# Altium PCB PCB_Supply_Valvulado.PcbDoc
Units mm, origin at the board's own origin, x right, y up, seen from the top; angles counter-clockwise.
Board outline 49 x 60 mm, 2 copper layers (Top Layer, Bottom Layer); 6 components, 36 nets, 21 pads, 0 vias.
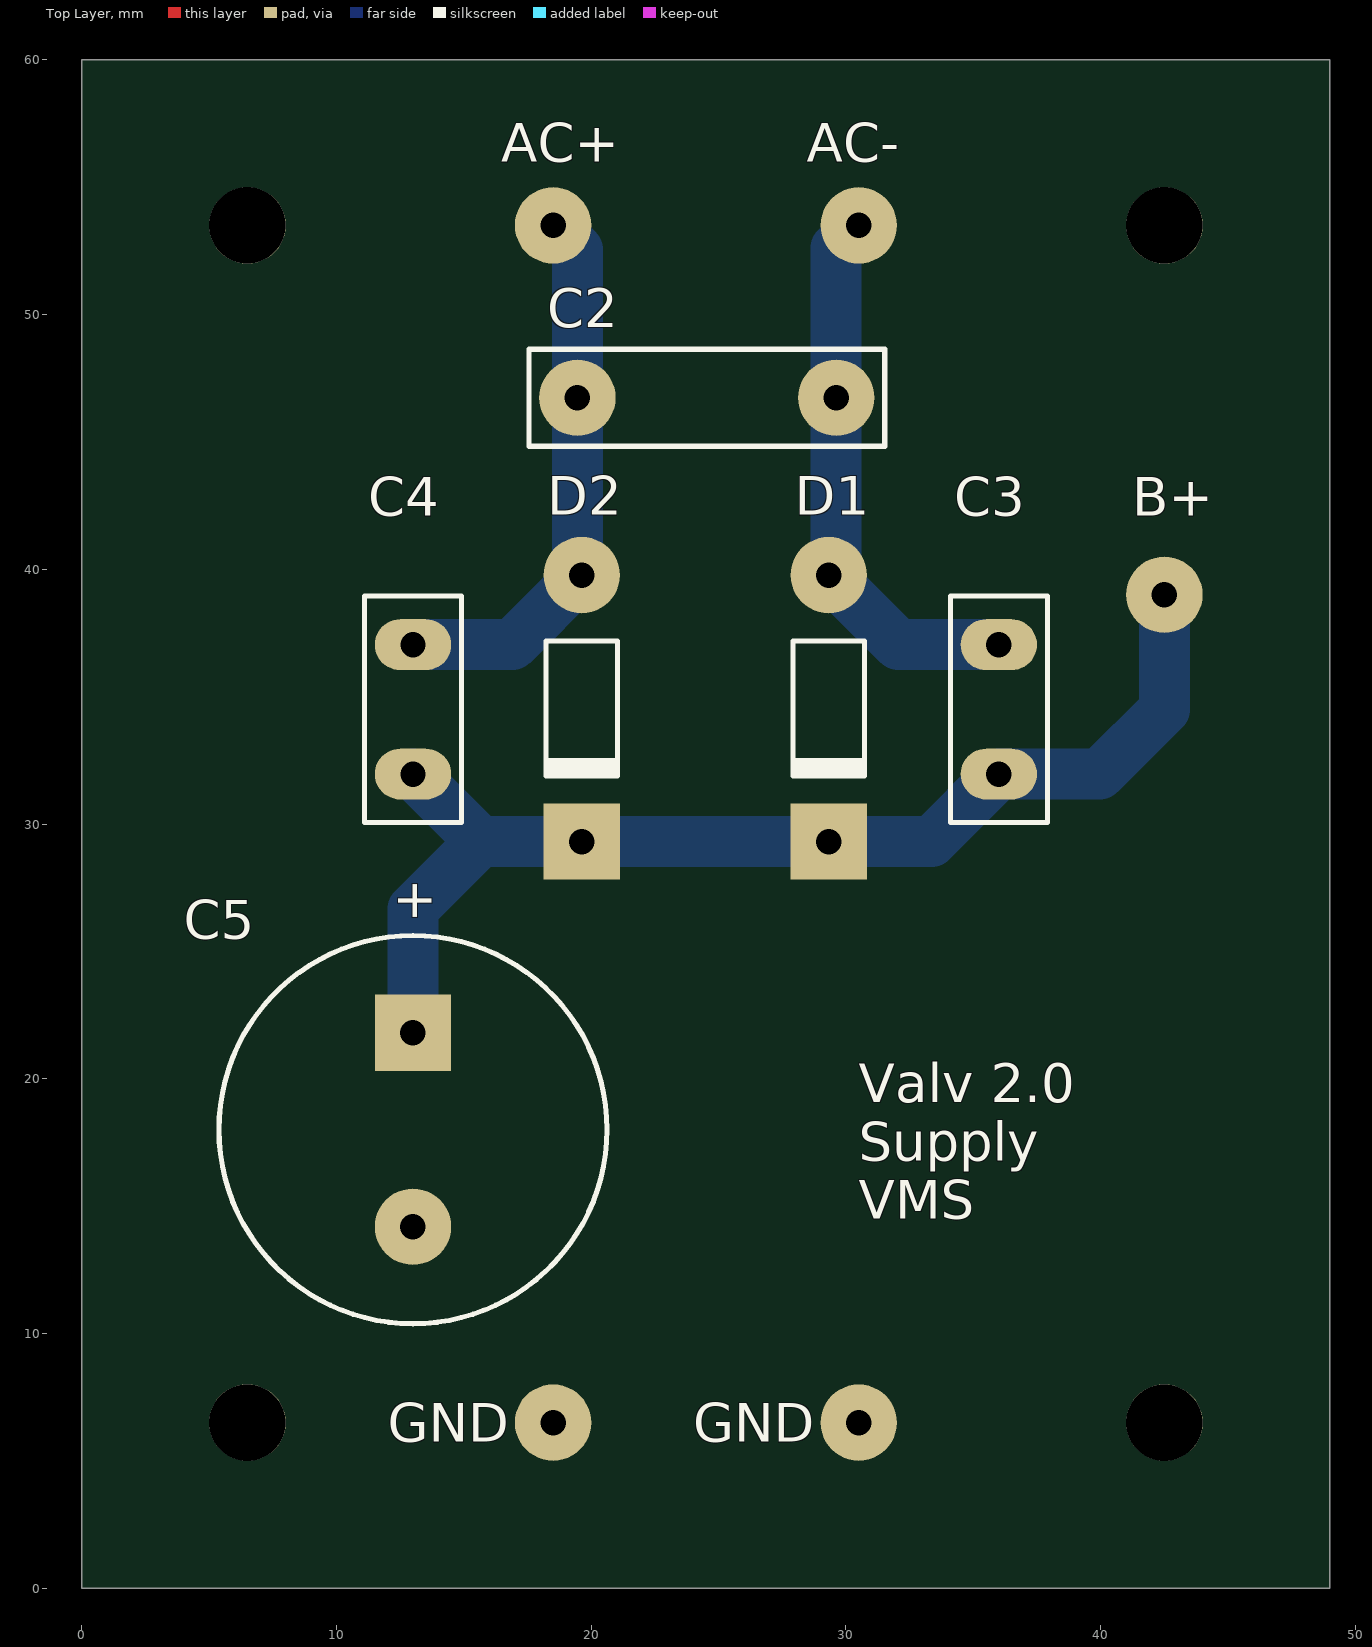
[diagram p0: Top Layer view]
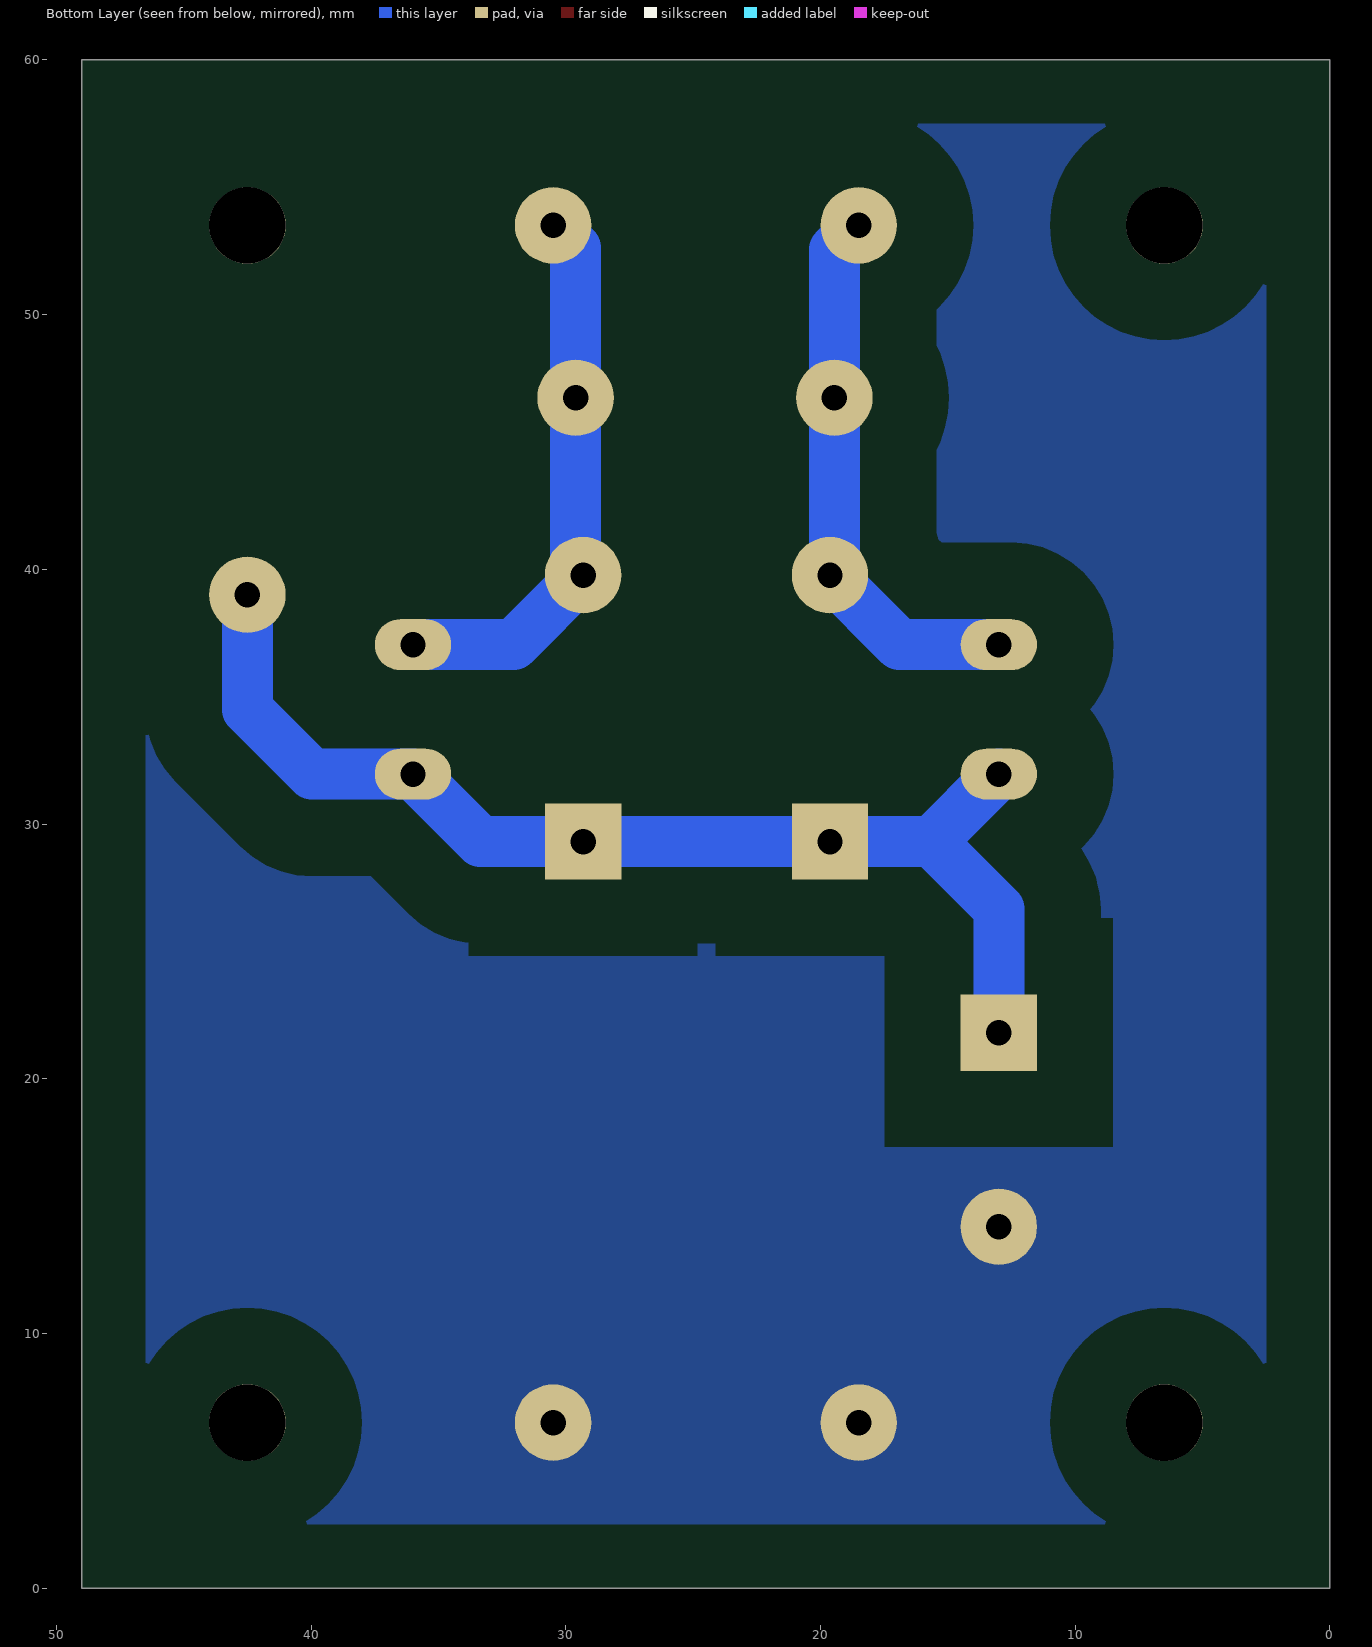
[diagram p1: Bottom Layer view, seen from below]
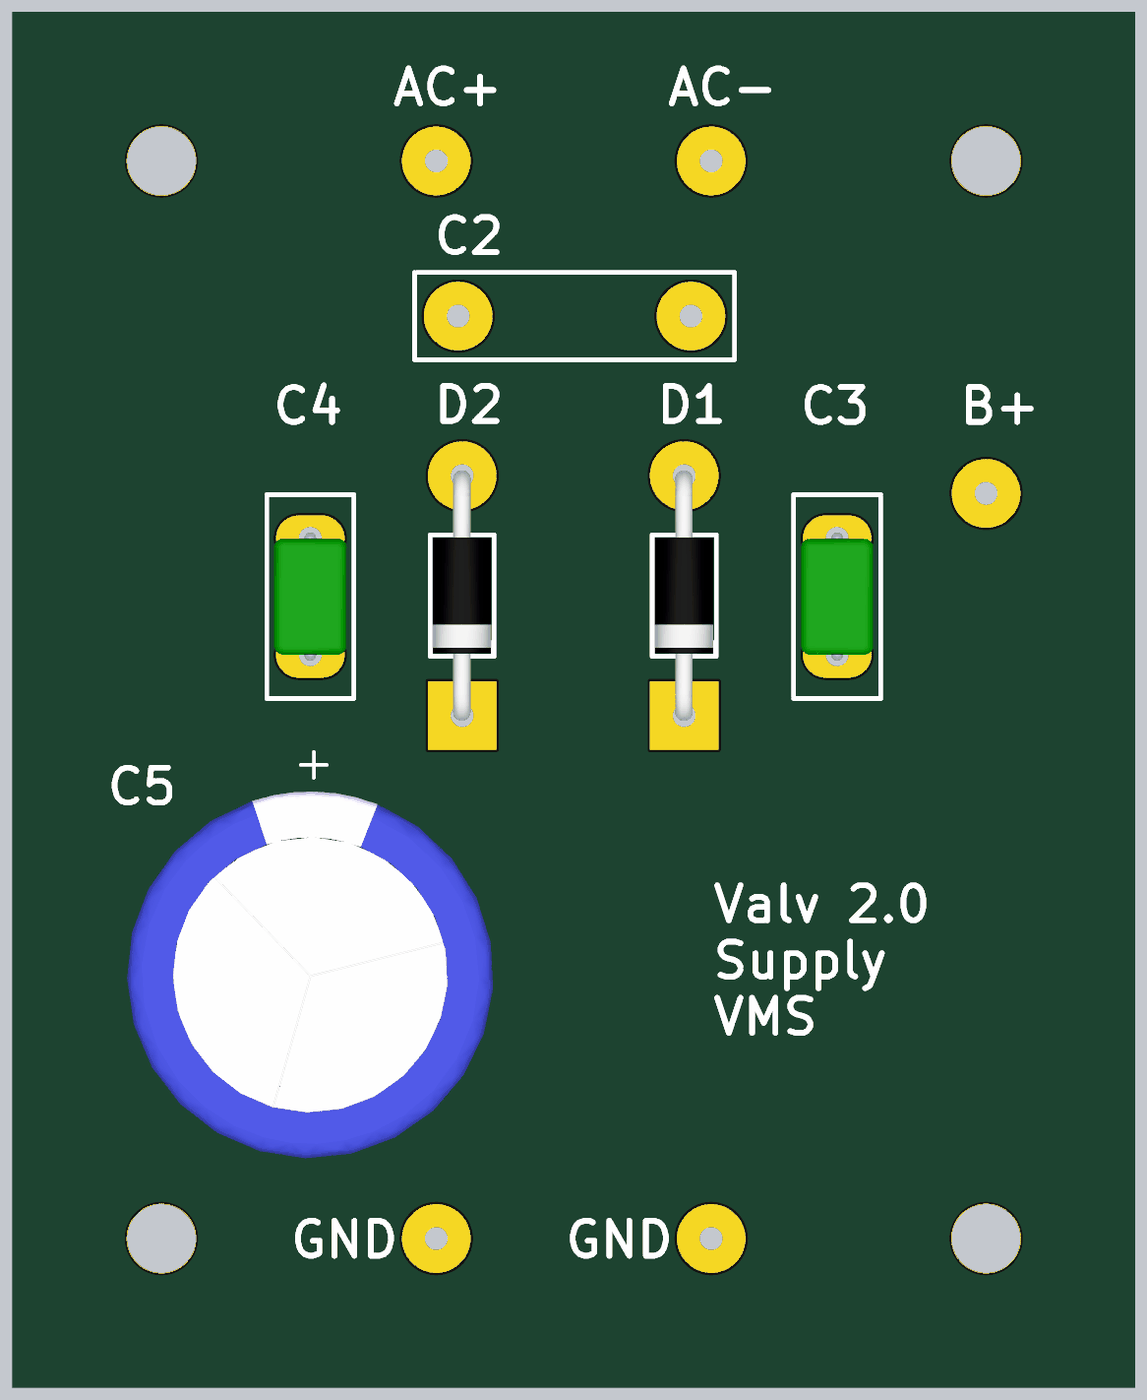
[diagram p2: 3D render of the assembled board from above, using the file's embedded part models]

## Layer stack, top to bottom
Top Solder: solder mask 0.0102, Solder Resist, Dk 3.5
Top Layer: signal copper 0.0356
Dielectric 1: dielectric 0.32, FR-4, Dk 4.8
Bottom Layer: signal copper 0.0356
Bottom Solder: solder mask 0.0102, Solder Resist, Dk 3.5

## Board outline
0,0 0,60 49,60 49,0

## Design rules (kind name [scope] priority, off if disabled: settings)
Clearance [All] p1: gap=3
HoleSize [All] p1: absolutevalues=TRUE maxlimit=2.54 minlimit=1 maxpercent=80.000 minpercent=20.000
PlaneConnect [All] p1: planeconnectstyle=Direct reliefexpansion=0.508 reliefentries=4 reliefconductorwidth=1 reliefairgap=0.254
PolygonConnect [All] p1: connectstyle=Direct reliefconductorwidth=1 reliefentries=4 polygonreliefangle="90 Angle" airgapwidth=0.254
RoutingTopology [All] p1: topology=Starburst
RoutingVias [All] p1: holewidth=1 width=4 viastyle="Through Hole" minholewidth=1 minwidth=3 maxholewidth=2 maxwidth=10
SolderMaskExpansion [All] p1: expansion=0.102
Width [All] p1: maxlimit=3 minlimit=0.6 preferedwidth=1
27 further rules are at their usual default settings.

## Components (designator, comment, footprint, x,y, rotation, side; value= is the part's Value field where it differs from the comment)
C2 "630V" RAD-0.4 24.536,46.734 r0 top
C3 "" RAD-0.2 36,34.5 r270 top
C4 "" RAD-0.2 13,34.5 r90 top
C5 "25V" RB7.6-15 13,18 r90 top
D1 "1N4006" DO-41 29.323,34.542 r270 top
D2 "1N4006" DO-41 19.628,34.542 r270 top

## Footprints (in the part's own frame and the unit in brackets; to place one, negate y for a bottom-side part, rotate by r counter-clockwise, add the part's x,y. Pads: shape width x height; smd on the part's side, far side on the other; paste and mask are expansions set on the pad)
DO-41 [mm] "Diode, Axial; Body 5.2 x 2.7 mm (LxDia. max), Lead Dia. 0.86 mm (max)"
  round 3 hole 1: 1(-5.23,0)
  rect 3x3 hole 1: 2(5.23,0)
  silkscreen extent -2.65,-1.4 2.75,1.4, body extent -5.46,-1.3 5.46,1.27, height 2.55
RAD-0.2 [mm] "Radial Cap, Thru-Hole; 2 Leads; 0.2 in Pin Spacing"
  oval 2x3 hole 1: 1(-2.54,0) 2(2.54,0)
  silkscreen extent -4.44,-1.91 4.44,1.91, body extent -2.79,-1.59 2.79,1.59, height 7.62
RAD-0.4 [mm] "Radial Cap, Thru-Hole; 2 Leads; 0.4 in Pin Spacing"
  round 3 hole 1: 1(-5.08,0) 2(5.08,0)
  silkscreen extent -6.98,-1.91 6.98,1.91
RB7.6-15 [mm] "Polarized Capacitor (Radial); 2 Leads"
  rect 3x3 hole 1: 1(3.81,0)
  round 3 hole 1: 2(-3.81,0)
  silkscreen extent -7.62,-7.62 7.62,7.62, body extent -8,-8 8,8, height 25.8

## Part data
C2 C3 C4: library part Cap, "Capacitor"
C5: library part "Cap Pol1", "Polarized Capacitor (Radial)"
D1 D2: library part "Diode 1N4006", "1 Amp General Purpose Rectifier"

## Free pads (board coordinates)
  round 3 hole 3: 0(6.5,6.5) 0(6.5,53.5) 0(42.5,6.5) 0(42.5,53.5)
  round 3 hole 1: 0(18.5,53.5) 0(42.5,39) 1(30.5,53.5) 3(18.5,6.5) 3(30.5,6.5)

## Nets (pads, with @x,y where several pads share a name; then routed paths per layer and width w, separated by ;. In a path a pad name is that pad's centre, name@x,y a point inside that pad or via, vN(x,y) a via of type N, cw(c..) or ccw(c..) an arc to the next point about the centre after c; other vN are vias at no path point)
B+: C3.2 C4.1 C5.1 D1.2 D2.2 pad.0@42.5,39 | length 45.8
  Bottom Layer w2: C5.1 13,26.664 15.648,29.312 ; C4.1 15.648,29.312 ; pad.0@42.5,39 42.5,34.5 39.96,31.96 C3.2 33.352,29.312 D1.2 D2.2 15.648,29.312
GND: C5.2 pad.3
NetC1_1: 
NetC1_2: 
NetC2_1: C2.1 C4.2 D2.1 pad.0@18.5,53.5 | length 22
  Bottom Layer w2: C4.2 16.896,37.04 D2.1 19.456,39.944 C2.1 19.456,52.544 pad.0@18.5,53.5
NetC2_2: C2.2 C3.1 D1.1 pad.1 | length 22
  Bottom Layer w2: pad.1 29.616,52.616 C2.2 29.616,40.065 D1.1 32.055,37.04 C3.1
NetC7_1: 
NetC8_1: 
NetC8_2: 
NetC9_1: 
NetC10_1: 
NetC10_2: 
NetC11_1: 
NetC11_2: 
NetC12_1: 
NetC13_1: 
NetD5_1: 
NetD5_2: 
NetF1_1: 
NetF2_1: 
NetJ1_1: 
NetJ1_2: 
NetJ1_5: 
NetJ3_1: 
NetJ3_5: 
NetPOT_3: 
NetR1_2: 
NetR5_1: 
NetR7_1: 
NetR14_1: 
NetR16_2: 
NetS2_1: 
NetS2_3: 
NetS3_1: 
NetS3_3: 
NetT2_2: 

## Polygon pours and split planes (outlines as drawn)
GND on Bottom Layer "GND Bottom" (solid, remove dead copper, pour order 10): 2.5,2.5 2.5,57.5 46.5,57.5 46.5,2.5

## Silkscreen, mask and mechanical layers (free items; w line width, h text height)
Top Overlay:
  text "AC+" at 16.469,56 h1.52
  text "AC-" at 28.469,56 h1.52
  text "B+" at 41.23,42.103 h1.52
  text "Valv 2.0 / Supply / VMS" at 30.5,14.5 h1.52
  text "GND" at 12,5.738 h1.52
  text "GND" at 24,5.738 h1.52

## Text inside footprints (layer, text, board x,y; h text height)
C5: Top Overlay "+" at 13.736,26.132 h1.5 r90